# EAGLE board Power Supply Panel (EAGLE 6.5.0)

No outline drawn. Coordinates in mm, seen from the top.
Copper layers (1*16): layer 1 0.035mm / dielectric 1.5mm / layer 16 0.035mm
Design rules "default": minimum track width 10mil, minimum drill 24mil, track to track 8mil, track to pad 8mil, pad to pad 8mil, via to via 8mil, smd to smd 8mil, copper to edge 40mil, drill to drill 8mil, minimum pad ring 10mil, minimum via ring 8mil, stop-mask expansion 4mil, vias tented up to drill 0mil, thermal gap 10mil

## Placement (x,y rotation side)
E$1  [4U_5]  0,0 0 top
E$2  [FAN_9MM_V2]  69.85,120.65 0 top
E$3  [GENESIS_LOGO_2]  5.71,12.7 0 top
E$4  [DRILL_#6-32]  122.24,155.57 0 top
E$5  [DRILL_#6-32]  122.24,88.9 0 top
E$6  [DRILL_#6-32]  122.24,22.23 0 top
E$7  [LED_3MM]  19.05,161.29 0 top
E$8  [LED_3MM]  19.05,138.43 0 top
E$9  [LED_3MM]  19.05,130.81 0 top
E$10  [LED_3MM]  19.05,109.22 0 top
E$11  [LED_3MM]  19.05,101.6 0 top
E$12  [TOGGLE_SWITCH_TAYDA]  11.43,116.84 0 top
E$13  [TOGGLE_SWITCH_TAYDA]  11.43,86.36 0 top
E$14  [RCA_JACK_TAYDA]  13.97,57.15 0 top
E$15  [RCA_JACK_TAYDA]  29.21,57.15 0 top
E$17  [RCA_JACK_TAYDA]  59.69,57.15 0 top
E$18  [RCA_JACK_TAYDA]  44.45,57.15 0 top
E$19  [RCA_JACK_TAYDA]  74.93,57.15 0 top

## Library data of the parts
E$1-E$15 E$17-E$19 = !synth_panel

## Text on the board
PartProfile: 20.4 V / Adapter | 19.39 V Adapter
PanelSupportRails: 0.375 inch divider
PanelText: +5 V | Logic | -12 V | +12 V | Rails | +20 V | -20 V | Power In | -20 V | +20 V | +12 V | -12 V | +5 V | Genesis Power Module